# EAGLE board ATTiny5 (EAGLE 6.4)
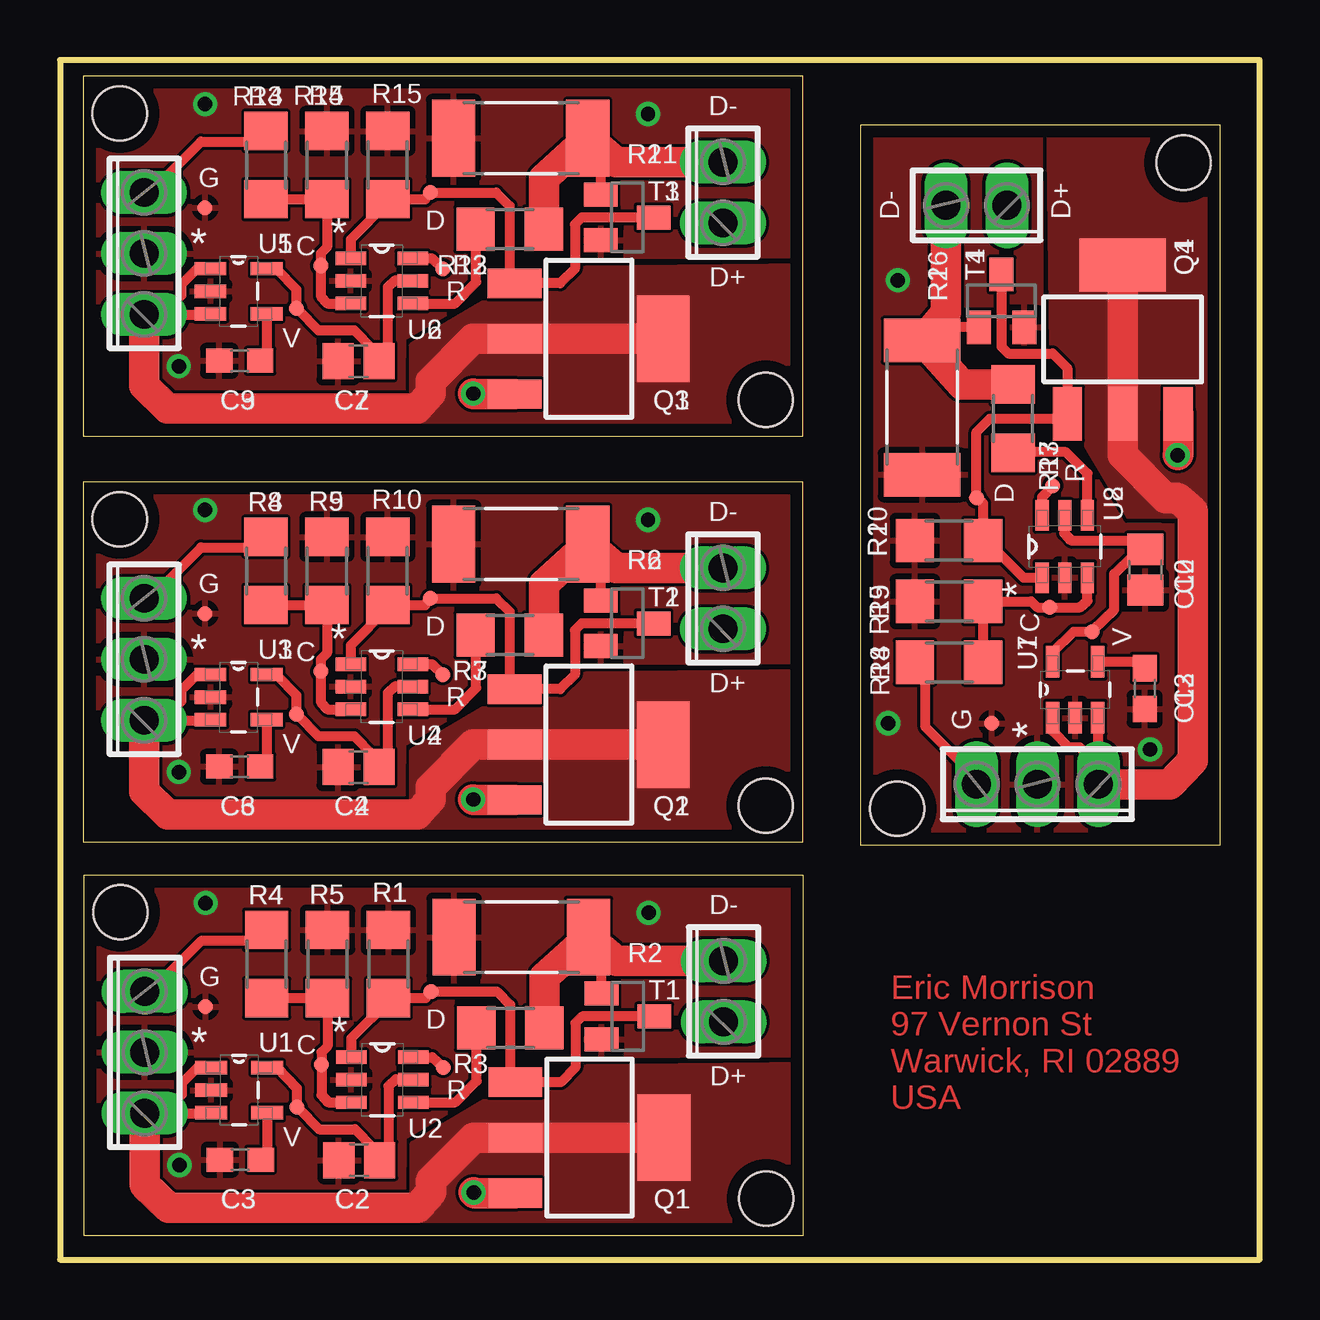
[diagram p0: board, top side]
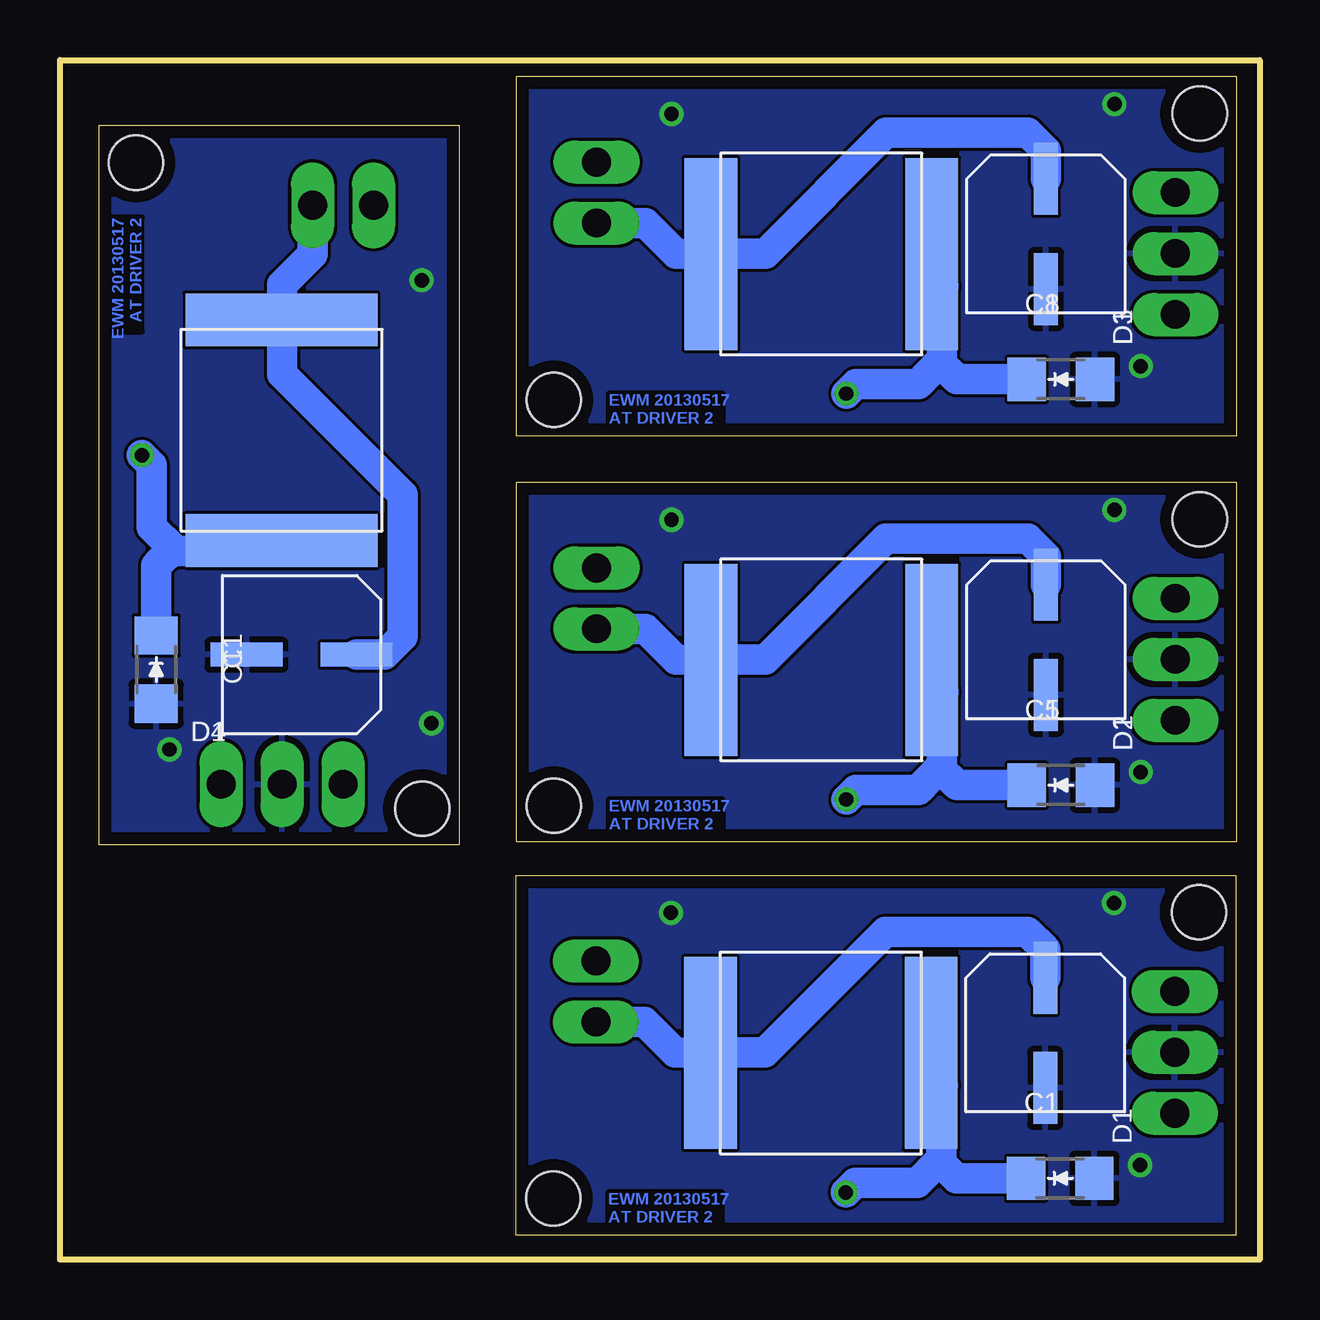
[diagram p1: board, bottom side, seen from below]

Size 50 x 50 mm. Coordinates in mm from the lower left corner, seen from the top.
Outline: 0.99,1.02 30.99,1.02 30.99,16.02 0.99,16.02 0.99,1.02
Outline: 0,0 50,0 50,50 0,50 0,0
Outline: 0.96,17.4 30.96,17.4 30.96,32.4 0.96,32.4 0.96,17.4
Outline: 0.96,34.31 30.96,34.31 30.96,49.31 0.96,49.31 0.96,34.31
Outline: 48.36,17.27 48.36,47.27 33.36,47.27 33.36,17.27 48.36,17.27
Copper layers (1*16): Top 0.035mm / dielectric 1.5mm / Bottom 0.035mm
Design rules "default *": minimum track width 10mil, minimum drill 10mil, track to track 5mil, track to pad 5mil, pad to pad 5mil, via to via 5mil, smd to smd 0mil, copper to edge 20mil, drill to drill 5mil, minimum pad ring 10mil, minimum via ring 8mil, stop-mask expansion 4mil, vias tented up to drill 0mil, thermal gap 10mil
Holes 2.26 mm at 2.51,14.48 29.44,2.54 2.49,30.86 29.41,18.92 2.49,47.78 29.41,35.84 34.9,18.8 46.84,45.72

## Footprints (pad centres in the part's own frame; a part is rotated, then mirrored left to right if it is on the bottom)
TPI_PAD = smd 0.635 x 0.635: P$1 0,0
CDE-AVE-X = smd 3 x 1: C+ 2.3,0; C- -2.3,0
C0805 = smd 1.3 x 1.5: 1 -0.85,0; 2 0.85,0
C0603 = smd 1.1 x 1: 1 -0.85,0; 2 0.85,0
D1206 = smd 1.6 x 1.803: 1 -1.422,0; 2 1.422,0
SRN8040 = smd 2.2 x 8: P$1 -4.6,0; P$2 4.6,0
SOT223 = smd 1.219 x 2.235: 1 -2.311,-3.099; 2 0,-3.099; 3 2.311,-3.099 | smd 3.6 x 2.2: TAB 0,3.099
R1206 = smd 1.6 x 1.803: 1 -1.422,0; 2 1.422,0
R2512 = smd 1.8 x 3.2: 1 -2.8,0; 2 2.8,0
SOT23 = smd 1 x 1.4: 1 -0.95,-1.1; 2 0.95,-1.1; 3 0,1.1
SOT95P280X145-5N = smd 1.321 x 0.559: 1 -1.168,0.94; 2 -1.168,0; 3 -1.168,-0.94; 4 1.168,-0.94; 5 1.168,0.94
SOT95P280X145-6N = smd 1.27 x 0.559: 1 -1.295,0.94; 2 -1.295,0; 3 -1.295,-0.94; 4 1.295,-0.94; 5 1.295,0; 6 1.295,0.94
2POL254 = drill 1.2 long: 1 -1.27,0; 2 1.27,0
3POL254 = drill 1.2 long: 1 -2.54,0; 2 0,0; 3 2.54,0

## Placement (x,y rotation side)
+5V  TPI  [TPI_PAD]  9.88,6.35 0 top
+5V1  TPI  [TPI_PAD]  9.86,22.73 0 top
+5V2  TPI  [TPI_PAD]  9.86,39.65 0 top
+5V3  TPI  [TPI_PAD]  43.03,26.16 90 top
C1  100u  [CDE-AVE-X]  8.93,9.45 90 bottom
C2  .1u  [C0805]  12.47,4.14 180 top
C3  10n  [C0603]  7.52,4.17 180 top
C4  .1u  [C0805]  12.45,20.52 180 top
C5  100u  [CDE-AVE-X]  8.9,25.83 90 bottom
C6  10n  [C0603]  7.49,20.55 180 top
C7  .1u  [C0805]  12.45,37.44 180 top
C8  100u  [CDE-AVE-X]  8.9,42.75 90 bottom
C9  10n  [C0603]  7.49,37.47 180 top
C10  .1u  [C0805]  45.24,28.75 270 top
C11  100u  [CDE-AVE-X]  39.93,25.21 0 bottom
C12  10n  [C0603]  45.21,23.8 270 top
D1  CD1206-B260  [D1206]  8.31,3.39 0 bottom
D2  CD1206-B260  [D1206]  8.28,19.77 0 bottom
D3  CD1206-B260  [D1206]  8.28,36.69 0 bottom
D4  CD1206-B260  [D1206]  45.99,24.59 270 bottom
GND  TPI  [TPI_PAD]  6.07,10.54 0 top
GND1  TPI  [TPI_PAD]  6.05,26.92 0 top
GND2  TPI  [TPI_PAD]  6.05,43.84 0 top
GND3  TPI  [TPI_PAD]  38.84,22.35 90 top
L1  SRN8040  [SRN8040]  18.29,8.61 180 bottom
L2  SRN8040  [SRN8040]  18.26,24.99 180 bottom
L3  SRN8040  [SRN8040]  18.26,41.91 180 bottom
L4  SRN8040  [SRN8040]  40.77,34.57 90 bottom
Q1  BSP100  [SOT223]  22.07,5.08 270 top
Q2  BSP100  [SOT223]  22.05,21.46 270 top
Q3  BSP100  [SOT223]  22.05,38.38 270 top
Q4  BSP100  [SOT223]  44.3,38.35 0 top
R1  10k  [R1206]  13.69,12.32 270 top
R2  1  [R2512]  19.23,13.44 0 top
R3  10k  [R1206]  18.77,9.65 180 top
R4  910  [R1206]  8.61,12.32 90 top
R5  300  [R1206]  11.15,12.32 90 top
R6  1  [R2512]  19.2,29.82 0 top
R7  10k  [R1206]  18.75,26.04 180 top
R8  910  [R1206]  8.59,28.7 90 top
R9  300  [R1206]  11.13,28.7 90 top
R10  10k  [R1206]  13.67,28.7 270 top
R11  1  [R2512]  19.2,46.74 0 top
R12  10k  [R1206]  18.75,42.95 180 top
R13  910  [R1206]  8.59,45.62 90 top
R14  300  [R1206]  11.13,45.62 90 top
R15  10k  [R1206]  13.67,45.62 270 top
R16  1  [R2512]  35.94,35.51 90 top
R17  10k  [R1206]  39.73,35.05 270 top
R18  910  [R1206]  37.06,24.89 180 top
R19  300  [R1206]  37.06,27.43 180 top
R20  10k  [R1206]  37.06,29.97 0 top
RESET  TPI  [TPI_PAD]  15.98,8 0 top
RESET1  TPI  [TPI_PAD]  15.95,24.38 0 top
RESET2  TPI  [TPI_PAD]  15.95,41.3 0 top
RESET3  TPI  [TPI_PAD]  41.38,32.26 90 top
T1  BC846  [SOT23]  23.67,10.13 270 top
T2  BC846  [SOT23]  23.65,26.52 270 top
T3  BC846  [SOT23]  23.65,43.43 270 top
T4  BC846  [SOT23]  39.24,39.95 0 top
TPICLK  TPI  [TPI_PAD]  10.9,8.13 0 top
TPICLK1  TPI  [TPI_PAD]  10.87,24.51 0 top
TPICLK2  TPI  [TPI_PAD]  10.87,41.43 0 top
TPICLK3  TPI  [TPI_PAD]  41.25,27.18 90 top
TPIDATA  TPI  [TPI_PAD]  15.47,11.18 0 top
TPIDATA1  TPI  [TPI_PAD]  15.44,27.56 0 top
TPIDATA2  TPI  [TPI_PAD]  15.44,44.48 0 top
TPIDATA3  TPI  [TPI_PAD]  38.2,31.75 90 top
U1  SPX5205M5-L-3-3  [SOT95P280X145-5N]  7.47,7.06 0 top
U2  ATTINY5-TSHR  [SOT95P280X145-6N]  13.44,7.49 0 top
U3  SPX5205M5-L-3-3  [SOT95P280X145-5N]  7.44,23.44 0 top
U4  ATTINY5-TSHR  [SOT95P280X145-6N]  13.41,23.88 0 top
U5  SPX5205M5-L-3-3  [SOT95P280X145-5N]  7.44,40.36 0 top
U6  ATTINY5-TSHR  [SOT95P280X145-6N]  13.41,40.79 0 top
U7  SPX5205M5-L-3-3  [SOT95P280X145-5N]  42.32,23.75 90 top
U8  ATTINY5-TSHR  [SOT95P280X145-6N]  41.88,29.72 90 top
X1  DIODES  [2POL254]  27.66,11.18 90 top
X2  INPUT  [3POL254]  3.53,8.64 90 top
X3  INPUT  [3POL254]  3.51,25.02 90 top
X4  DIODES  [2POL254]  27.64,27.56 90 top
X5  INPUT  [3POL254]  3.51,41.94 90 top
X6  DIODES  [2POL254]  27.64,44.48 90 top
X7  INPUT  [3POL254]  40.74,19.81 180 top
X8  DIODES  [2POL254]  38.2,43.94 180 top

## Library data of the parts
+5V +5V1-+5V3 GND GND1-GND3 RESET RESET1-RESET3 TPICLK TPICLK1-TPICLK3 TPIDATA TPIDATA1-TPIDATA3 = Personal
C1 C5 C8 C11 = Personal; DIGIKEY: 338-1805-1-ND; DIGIKEY_COST: .21
C2 C4 C7 C10 = resistor; DIGIKEY: 445-7534-1-ND; DIGIKEY_COST: .10
C3 C6 C9 C12 = resistor; DIGIKEY: 445-1311-1-ND; DIGIKEY_COST: .10
D1-D4 = Personal; DIGIKEY: CD1206-B260CT-ND; DIGIKEY_COST: .49
L1-L4 = Personal; DIGIKEY: SRN8040-101MCT-ND; DIGIKEY_COST: .54
Q1-Q4 = Personal; DIGIKEY: 568-6956-1-ND; DIGIKEY_COST: .69
R1 R3 R7 R10 R12 R15 R17 R20 = resistor; DIGIKEY: RMCF1206JT10K0CT-ND; DIGIKEY_COST: .05
R2 R6 R11 R16 = resistor; DIGIKEY: A102191CT-ND; DIGIKEY_COST: .14
R4 R8 R13 R18 = resistor; DIGIKEY: RMCF1206JT910RCT-ND; DIGIKEY_COST: .05
R5 R9 R14 R19 = resistor; DIGIKEY: RMCF1206JT300RCT-ND; DIGIKEY_COST: .05
T1-T4 = transistor; DIGIKEY: BC846BMTFCT-ND; DIGIKEY_COST: .17
U1 U3 U5 U7 = Exar_By_element14_Batch_1; DIGIKEY: 1016-1251-ND; DIGIKEY_COST: .60; MPN: SPX5205M5-L-3-3; OC_FARNELL: 1831954; OC_NEWARK: 23R9851; PACKAGE: SOT-23-5; SUPPLIER: EXAR
U2 U4 U6 U8 = Atmel_By_element14_Batch_1; DESCRIPTION: Microcontroller; DIGIKEY: ATTINY10-TSHRCT-ND; DIGIKEY_COST: .69; MPN: ATTINY5-TSHR; OC_FARNELL: 1841626; OC_NEWARK: 12T1342; PACKAGE: SOT563-6; SUPPLIER: ATMEL
X1-X8 = con-phoenix-254; OC_FARNELL: unknown; OC_NEWARK: unknown

## Nets
+14V: Q1.2 Q1.TAB U1.1 U1.3 X2.1
+14V1: Q2.2 Q2.TAB U3.1 U3.3 X3.1
+14V2: Q3.2 Q3.TAB U5.1 U5.3 X5.1
+14V3: Q4.2 Q4.TAB U7.1 U7.3 X7.1
BLINK: R4.1 R5.1 TPICLK.P$1 U2.3
BLINK1: R8.1 R9.1 TPICLK1.P$1 U4.3
BLINK2: R13.1 R14.1 TPICLK2.P$1 U6.3
BLINK3: R18.1 R19.1 TPICLK3.P$1 U8.3
D-: R2.2 R3.1 T1.1 X1.2
D-1: R6.2 R7.1 T2.1 X4.2
D-2: R11.2 R12.1 T3.1 X6.2
D-3: R16.2 R17.1 T4.1 X8.2
GND: C1.C- C2.2 C3.2 D1.2 GND.P$1 R1.1 R2.1 R5.2 T1.2 U1.2 U2.2 X2.2
GND1: C4.2 C5.C- C6.2 D2.2 GND1.P$1 R6.1 R9.2 R10.1 T2.2 U3.2 U4.2 X3.2
GND2: C7.2 C8.C- C9.2 D3.2 GND2.P$1 R11.1 R14.2 R15.1 T3.2 U5.2 U6.2 X5.2
GND3: C10.2 C11.C- C12.2 D4.2 GND3.P$1 R16.1 R19.2 R20.1 T4.2 U7.2 U8.2 X7.2
L+: D1.1 L1.P$1 Q1.3
L+1: D2.1 L2.P$1 Q2.3
L+2: D3.1 L3.P$1 Q3.3
L+3: D4.1 L4.P$1 Q4.3
MEASURE: R3.2 U2.4
MEASURE1: R7.2 U4.4
MEASURE2: R12.2 U6.4
MEASURE3: R17.2 U8.4
MOSFET: Q1.1 R1.2 T1.3 TPIDATA.P$1 U2.1
MOSFET1: Q2.1 R10.2 T2.3 TPIDATA1.P$1 U4.1
MOSFET2: Q3.1 R15.2 T3.3 TPIDATA2.P$1 U6.1
MOSFET3: Q4.1 R20.2 T4.3 TPIDATA3.P$1 U8.1
N$1: R4.2 X2.3
N$2: C3.1 U1.4
N$3: C1.C+ L1.P$2 X1.1
N$4: C5.C+ L2.P$2 X4.1
N$5: R8.2 X3.3
N$6: C6.1 U3.4
N$7: C8.C+ L3.P$2 X6.1
N$8: R13.2 X5.3
N$9: C9.1 U5.4
N$10: C11.C+ L4.P$2 X8.1
N$11: R18.2 X7.3
N$12: C12.1 U7.4
RESET: RESET.P$1 U2.6
RESET1: RESET1.P$1 U4.6
RESET2: RESET2.P$1 U6.6
RESET3: RESET3.P$1 U8.6
VCC: +5V.P$1 C2.1 U1.5 U2.5
VCC1: +5V1.P$1 C4.1 U3.5 U4.5
VCC2: +5V2.P$1 C7.1 U5.5 U6.5
VCC3: +5V3.P$1 C10.1 U7.5 U8.5

## Tracks (layer width: path | path; a pad name or v marks a point on that pad's centre or on a via)
+14V
  Top 0.406: X2.1 4.29,6.1 | 4.29,6.1 6.27,6.1 U1.3 | U1.1 5.74,8 5.08,7.34 5.08,6.88 4.29,6.1
  Top 1.27: X2.1 3.53,3.12 4.52,2.16 14.91,2.16 15.47,2.79 15.47,3.3 17.25,5.08 Q1.2 Q1.TAB
  pour Top: 14.71,4.83 19.15,7.47 20.02,8 31.5,8.13 31.47,0.25 14.71,0.25
+14V1
  Top 0.406: X3.1 4.27,22.48 | 4.27,22.48 6.25,22.48 U3.3 | U3.1 5.71,24.38 5.05,23.72 5.05,23.27 4.27,22.48
  Top 1.27: X3.1 3.5,19.51 4.5,18.54 14.88,18.54 15.44,19.18 15.44,19.68 17.22,21.46 Q2.2 Q2.TAB
  pour Top: 14.68,21.21 19.13,23.85 19.99,24.38 31.47,24.51 31.45,16.64 14.68,16.64
+14V2
  Top 0.406: X5.1 4.27,39.4 | 4.27,39.4 6.25,39.4 U5.3 | U5.1 5.71,41.3 5.05,40.64 5.05,40.18 4.27,39.4
  Top 1.27: X5.1 3.5,36.42 4.5,35.46 14.88,35.46 15.44,36.09 15.44,36.6 17.22,38.38 Q3.2 Q3.TAB
  pour Top: 14.68,38.13 19.13,40.77 19.99,41.3 31.47,41.43 31.45,33.55 14.68,33.55
+14V3
  Top 0.406: X7.1 43.28,20.57 | 43.28,20.57 43.28,22.55 U7.3 | U7.1 41.38,22.02 42.04,21.36 42.49,21.36 43.28,20.57
  Top 1.27: X7.1 46.25,19.81 47.22,20.8 47.22,31.19 46.58,31.75 46.08,31.75 44.3,33.53 Q4.2 Q4.TAB
  pour Top: 44.55,30.99 41.91,35.43 41.38,36.3 41.25,47.78 49.12,47.75 49.12,30.99
BLINK
  Top 0.406: R4.1 R5.1 11.15,8.89 10.9,8.64 TPICLK.P$1 10.9,6.86 11.18,6.55 U2.3
BLINK1
  Top 0.406: R8.1 R9.1 11.12,25.27 10.87,25.02 TPICLK1.P$1 10.87,23.24 11.15,22.94 U4.3
BLINK2
  Top 0.406: R13.1 R14.1 11.12,42.19 10.87,41.94 TPICLK2.P$1 10.87,40.16 11.15,39.85 U6.3
BLINK3
  Top 0.406: R18.1 R19.1 40.49,27.43 40.74,27.18 TPICLK3.P$1 42.52,27.18 42.82,27.46 U8.3
D-
  Top 0.406: T1.1 22.57,13.07 R2.2
  Top 1.27: R3.1 20.19,11.78 R2.2 23.2,12.45 X1.2
D-1
  Top 0.406: T2.1 22.55,29.45 R6.2
  Top 1.27: R7.1 20.17,28.16 R6.2 23.17,28.83 X4.2
D-2
  Top 0.406: T3.1 22.55,46.37 R11.2
  Top 1.27: R12.1 20.17,45.08 R11.2 23.17,45.74 X6.2
D-3
  Top 0.406: T4.1 36.31,38.85 R16.2
  Top 1.27: R17.1 37.6,36.47 R16.2 36.93,39.48 X8.2
GND  (via drill 0.6)
  other vias: 4.98,3.94 6.07,14.86 24.54,14.45
  pour Top: -0.53,17.53 31.47,17.53 31.52,8.53 20.12,8.48 14.33,5.08 14.27,0.23 -0.28,0
  pour Bottom: 0.22,16.52 31.29,16.52 31.24,0.59 0.26,0.49
GND1  (via drill 0.6)
  other vias: 4.95,20.32 6.05,31.24 24.51,30.84
  pour Top: -0.56,33.91 31.45,33.91 31.5,24.92 20.09,24.87 14.3,21.46 14.25,16.61 -0.3,16.38
  pour Bottom: 0.19,32.9 31.27,32.9 31.22,16.97 0.24,16.87
GND2  (via drill 0.6)
  other vias: 4.95,37.24 6.05,48.16 24.51,47.75
  pour Top: -0.56,50.83 31.45,50.83 31.5,41.83 20.09,41.78 14.3,38.38 14.25,33.53 -0.3,33.3
  pour Bottom: 0.19,49.82 31.27,49.82 31.22,33.89 0.24,33.79
GND3  (via drill 0.6)
  other vias: 45.44,21.26 34.52,22.35 34.92,40.82
  pour Top: 31.85,15.75 31.85,47.75 40.84,47.8 40.89,36.4 44.3,30.61 49.15,30.56 49.38,16
  pour Bottom: 32.86,16.5 32.86,47.58 48.79,47.52 48.89,16.55
L+  (via drill 0.6)
  Top 1.27: Q1.3 17.27,2.77 v17.25,2.79
  Bottom 1.27: v17.25,2.79 16.84,3.2 14.25,3.2 13.36,4.11 | 13.36,4.11 13.26,4.22 13.26,7.21 | L1.P$1 13.26,8.61 13.26,7.21 | 13.21,7.26 13.26,7.21 | D1.1 12.64,3.39 13.36,4.11
L+1  (via drill 0.6)
  Top 1.27: Q2.3 17.25,19.15 v17.22,19.18
  Bottom 1.27: v17.22,19.18 16.82,19.58 14.23,19.58 13.34,20.49 | 13.34,20.49 13.23,20.6 13.23,23.6 | L2.P$1 13.23,24.99 13.23,23.6 | 13.18,23.65 13.23,23.6 | D2.1 12.62,19.77 13.34,20.49
L+2  (via drill 0.6)
  Top 1.27: Q3.3 17.25,36.07 v17.22,36.09
  Bottom 1.27: v17.22,36.09 16.82,36.5 14.23,36.5 13.34,37.41 | 13.34,37.41 13.23,37.52 13.23,40.51 | L3.P$1 13.23,41.91 13.23,40.51 | 13.18,40.56 13.23,40.51 | D3.1 12.62,36.69 13.34,37.41
L+3  (via drill 0.6)
  Top 1.27: Q4.3 46.61,33.55 v46.58,33.53
  Bottom 1.27: v46.58,33.53 46.18,33.12 46.18,30.53 45.27,29.64 | 45.27,29.64 45.16,29.54 42.16,29.54 | L4.P$1 40.77,29.54 42.16,29.54 | 42.11,29.49 42.16,29.54 | D4.1 45.99,28.93 45.27,29.64
MEASURE
  Top 0.406: U2.4 16.48,6.55 17.37,7.44 17.37,9.63 R3.2
MEASURE1
  Top 0.406: U4.4 16.46,22.94 17.35,23.82 17.35,26.01 R7.2
MEASURE2
  Top 0.406: U6.4 16.46,39.85 17.35,40.74 17.35,42.93 R12.2
MEASURE3
  Top 0.406: U8.4 42.82,32.77 41.94,33.66 39.75,33.66 R17.2
MOSFET
  Top 0.406: U2.1 12.14,9.22 13.69,10.77 R1.2 15.24,10.9 TPIDATA.P$1 18.21,11.18 18.77,10.62 18.77,7.59 Q1.1 | T1.3 21.77,10.13 21.49,9.86 21.49,8 20.88,7.39 Q1.1 | Q1.1
MOSFET1
  Top 0.406: U4.1 12.12,25.6 13.66,27.15 R10.2 15.22,27.28 TPIDATA1.P$1 18.19,27.56 18.75,27 18.75,23.98 Q2.1 20.85,23.77 21.46,24.38 21.46,26.24 21.74,26.52 T2.3
MOSFET2
  Top 0.406: U6.1 12.12,42.52 13.66,44.07 R15.2 15.22,44.2 TPIDATA2.P$1 18.19,44.48 18.75,43.92 18.75,40.89 Q3.1 20.85,40.69 21.46,41.3 21.46,43.16 21.74,43.43 T3.3
MOSFET3
  Top 0.406: U8.1 40.16,28.42 38.61,29.97 R20.2 38.48,31.53 TPIDATA3.P$1 38.2,34.49 38.76,35.05 41.78,35.05 Q4.1 41.99,37.16 41.38,37.77 39.52,37.77 39.24,38.05 T4.3
N$1
  Top 0.406: X2.3 3.79,11.18 5.91,13.3 8.61,13.3 R4.2
N$2
  Top 0.406: 8.51,3.87 C3.1 8.64,4.43 U1.4
N$3
  Bottom 1.27: X1.1 25.63,9.91 24.36,8.64 L1.P$2 22.86,8.64 20.62,8.64 15.6,13.66 9.68,13.66 8.93,12.92 C1.C+
N$4
  Bottom 1.27: X4.1 25.6,26.29 24.33,25.02 L2.P$2 22.84,25.02 20.6,25.02 15.57,30.05 9.65,30.05 8.9,29.3 C5.C+
N$5
  Top 0.406: X3.3 3.76,27.56 5.88,29.68 8.58,29.68 R8.2
N$6
  Top 0.406: 8.48,20.26 C6.1 8.61,20.82 U3.4
N$7
  Bottom 1.27: X6.1 25.6,43.2 24.33,41.94 L3.P$2 22.84,41.94 20.6,41.94 15.57,46.97 9.65,46.97 8.9,46.22 C8.C+
N$8
  Top 0.406: X5.3 3.76,44.48 5.88,46.6 8.58,46.6 R13.2
N$9
  Top 0.406: 8.48,37.17 C9.1 8.61,37.73 U5.4
N$10
  Bottom 1.27: X8.1 39.47,41.91 40.74,40.64 L4.P$2 40.74,39.14 40.74,36.91 35.71,31.88 35.71,25.96 36.46,25.21 C11.C+
N$11
  Top 0.406: X7.3 38.2,20.07 36.08,22.19 36.08,24.89 R18.2
N$12
  Top 0.406: 45.5,24.79 C12.1 44.94,24.92 U7.4
RESET
  Top 0.406: U2.6 15.52,8.43 RESET.P$1
RESET1
  Top 0.406: U4.6 15.49,24.82 RESET1.P$1
RESET2
  Top 0.406: U6.6 15.49,41.73 RESET2.P$1
RESET3
  Top 0.406: U8.6 40.95,31.8 RESET3.P$1
VCC
  Top 0.406: U2.5 13.99,7.52 13.69,7.24 13.69,4.23 C2.1 13.06,4.41 13.06,4.65 12.29,5.44 10.79,5.44 9.96,6.3 +5V.P$1 9.88,7.14 9.04,8 U1.5
VCC1
  Top 0.406: U4.5 13.97,23.9 13.66,23.62 13.66,20.61 C4.1 13.03,20.79 13.03,21.03 12.27,21.82 10.77,21.82 9.93,22.68 +5V1.P$1 9.86,23.52 9.02,24.38 U3.5
VCC2
  Top 0.406: U6.5 13.97,40.82 13.66,40.54 13.66,37.53 C7.1 13.03,37.7 13.03,37.95 12.27,38.73 10.77,38.73 9.93,39.6 +5V2.P$1 9.86,40.44 9.02,41.3 U5.5
VCC3
  Top 0.406: U8.5 41.86,30.28 42.14,29.97 45.15,29.97 C10.1 44.97,29.34 44.73,29.34 43.94,28.57 43.94,27.08 43.08,26.24 +5V3.P$1 42.24,26.16 41.38,25.32 U7.5

## Text on the board
Top: Eric Morrison / 97 Vernon St / Warwick, RI 02889 / USA
Bottom: EWM 20130517 / AT DRIVER 2 | EWM 20130517 / AT DRIVER 2 | EWM 20130517 / AT DRIVER 2 | EWM 20130517 / AT DRIVER 2
tNames: D- | G | D | D- | D+ | C | D+ | R | V | D | R | D- | G | D | C | V | C | D+ | R | G | V | D- | G | D | C | R | D+ | V
_tNames: R4 | R5 | R1 | R2 | T1 | U1 | R3 | T1 | Q1 | R2 | U2 | C3 | C2 | Q1 | R3 | R4 | R5 | R1 | U2 | R2 | R1 | C2 | R5 | T1 | R4 | U1 | R3 | U1 | C3 | U2 | C3 | C2 | Q1 | R4 | R5 | R1 | R2 | T1 | U1 | R3 | U2 | C3 | C2 | Q1
_bNames: D1 | C1 | C1 | D1 | C1 | D1 | D1 | C1